# EAGLE board board_schematic_v2 (EAGLE 9.5.2)
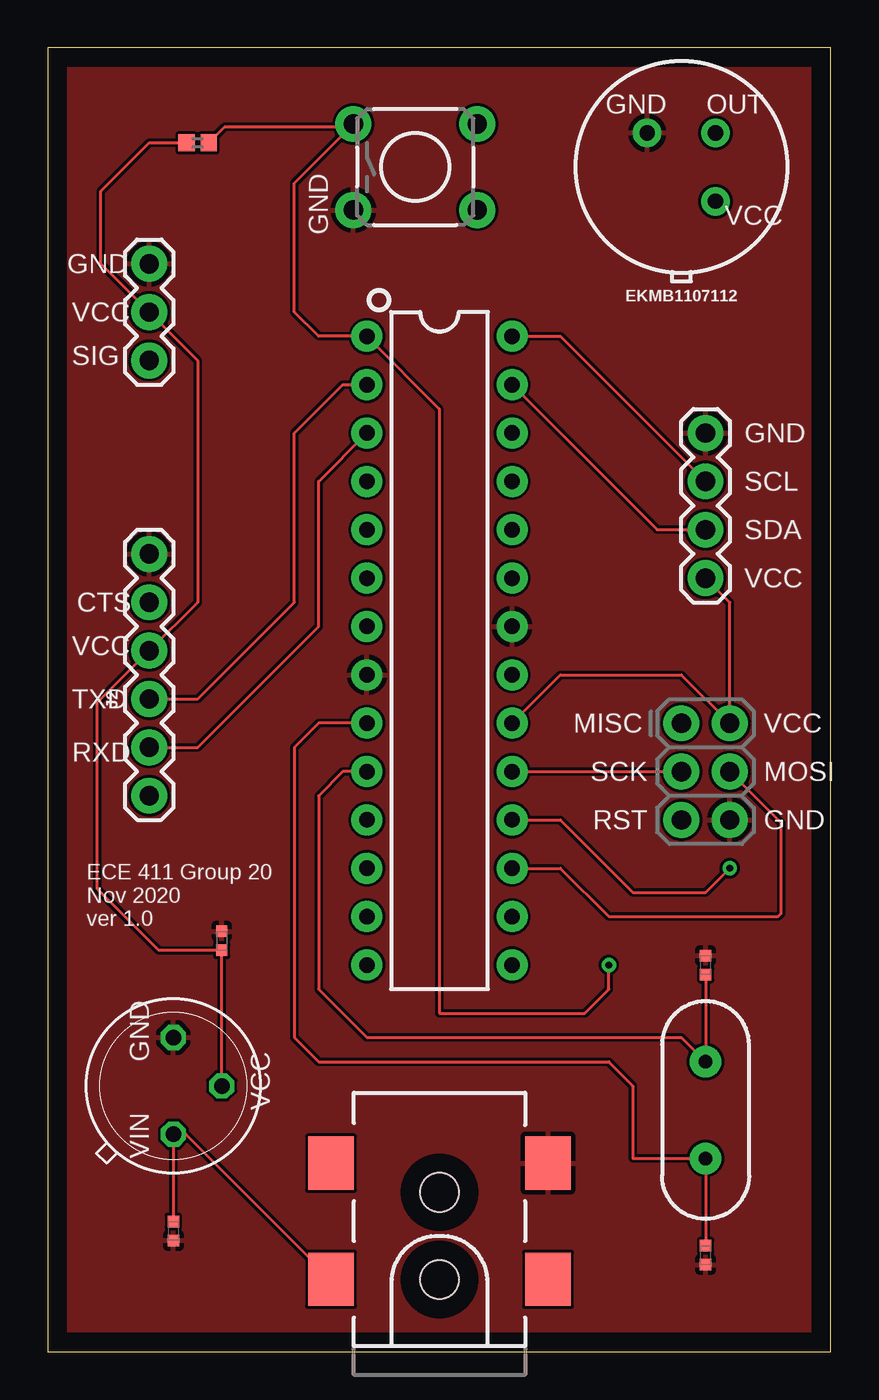
[diagram p0: board, top side]
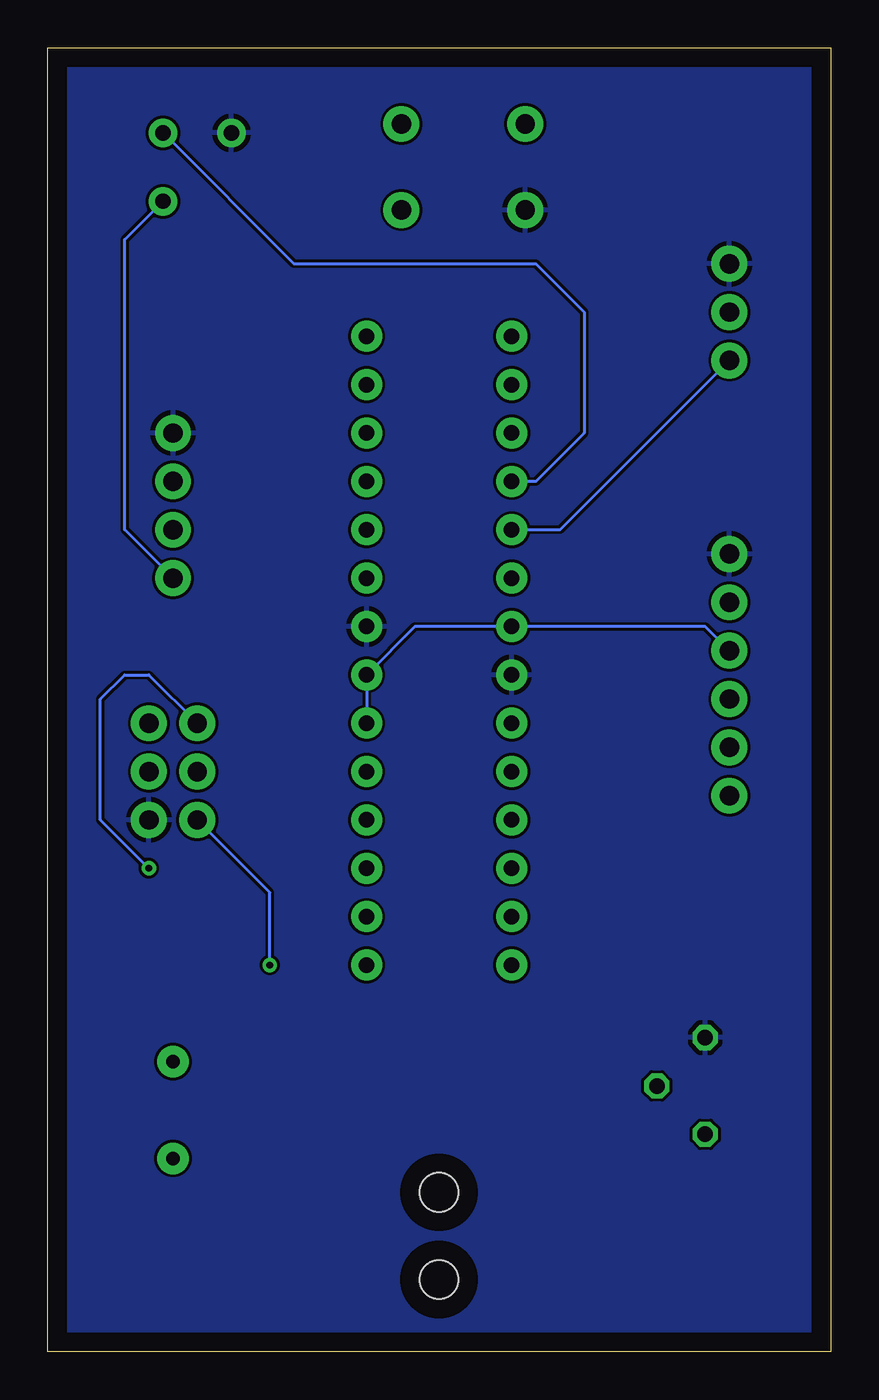
[diagram p1: board, bottom side, seen from below]

Size 41.13 x 68.5 mm. Coordinates in mm from the lower left corner, seen from the top.
Outline: 0,0 41.13,0 41.13,68.5 0,68.5 0,0
Copper layers (1*16): Top 0.035mm / dielectric 1.5mm / Bottom 0.035mm
Design rules "default": minimum track width 6mil, minimum drill 0.35mm, track to track 6mil, track to pad 6mil, pad to pad 6mil, via to via 6mil, smd to smd 6mil, copper to edge 40mil, drill to drill 6mil, minimum pad ring 10mil, minimum via ring 8mil, stop-mask expansion 4mil, vias tented up to drill 0mil, thermal gap 10mil

## Footprints (pad centres in the part's own frame; a part is rotated, then mirrored left to right if it is on the bottom)
0402-TIGHT = smd 0.6 x 0.6: 1 -0.5,0; 2 0.5,0
TO39 = drill 0.813 octagon: 1 0,-2.54; 2 2.54,0; 3 0,2.54
2X3-NS = drill 1.016 pad 1.88: 1 -2.54,-1.27; 2 -2.54,1.27; 3 0,-1.27; 4 0,1.27; 5 2.54,-1.27; 6 2.54,1.27
FTDI_BASIC = drill 1.016 pad 1.88: CTS 10.16,0; DTR 0,0; GND 12.7,0; RXI 2.54,0; TXO 5.08,0; VCC 7.62,0
1X04 = drill 1.016 pad 1.88: 1 0,0; 2 2.54,0; 3 5.08,0; 4 7.62,0
POWER_JACK_SMD = smd 2.8 x 2.4: GND 0,-5.7; P$4 6.1,-5.7; VIN0 0,5.7; VIN1 6.1,5.7 | hole 2.032: 0,0; 4.572,0
1X03 = drill 1.016 pad 1.88: 1 0,0; 2 2.54,0; 3 5.08,0
0402 = smd 0.85 x 0.9: 1 -0.58,0; 2 0.58,0
TACTILE_SWITCH_PTH_6.0MM = drill 1.016 pad 1.88: 1 -3.251,2.261; 2 3.251,2.261; 3 -3.251,-2.261; 4 3.251,-2.261
DIP28 = drill 0.813 pad 1.626: 1 -16.51,-3.81; 2 -13.97,-3.81; 3 -11.43,-3.81; 4 -8.89,-3.81; 5 -6.35,-3.81; 6 -3.81,-3.81; 7 -1.27,-3.81; 8 1.27,-3.81; 9 3.81,-3.81; 10 6.35,-3.81; 11 8.89,-3.81; 12 11.43,-3.81; 13 13.97,-3.81; 14 16.51,-3.81; 15 16.51,3.81; 16 13.97,3.81; 17 11.43,3.81; 18 8.89,3.81; 19 6.35,3.81; 20 3.81,3.81; 21 1.27,3.81; 22 -1.27,3.81; 23 -3.81,3.81; 24 -6.35,3.81; 25 -8.89,3.81; 26 -11.43,3.81; 27 -13.97,3.81; 28 -16.51,3.81
TO-3 = drill 0.8 pad 1.5: GND -1.796,1.796; OUT 1.796,1.796; VDD 1.796,-1.796
HC49US = drill 0.7 pad 1.651: 1 -2.54,0; 2 2.54,0

## Placement (x,y rotation side)
C3  22pF  [0402-TIGHT]  34.54,5.08 270 top
C4  10uF  [0402-TIGHT]  6.6,6.35 270 top
C5  10uF  [0402-TIGHT]  9.14,21.59 90 top
C6  22pF  [0402-TIGHT]  34.54,20.32 90 top
IC1  7805H  [TO39]  6.6,13.97 0 top
J1  AVR_SPI_PROG_3X2NS  [2X3-NS]  34.54,30.48 270 top
J2  6_PIN_SERIAL_CABLEPTH  [FTDI_BASIC]  5.33,29.21 90 top
J3  [1X04]  34.54,40.64 90 top
J4  5.5x2.1mm Barrel  [POWER_JACK_SMD]  20.57,3.81 90 top
M1  SERVO  [1X03]  5.33,52.07 90 top
R1  10k  [0402]  7.87,63.5 0 top
S1  MOMENTARY-SWITCH-SPST-PTH-6.0MM  [TACTILE_SWITCH_PTH_6.0MM]  19.3,62.23 0 top
U1  328P  [DIP28]  20.57,36.83 270 top
U4  EKMB1107112  [TO-3]  33.27,62.23 0 top
Y1  16MHz  [HC49US]  34.54,12.7 270 top

## Library data of the parts
C3 C6 = SparkFun-Capacitors; PROD_ID: CAP-14674
C4 C5 = SparkFun-Capacitors; PROD_ID: CAP-14848
IC1 = adafruit
J1 J2 = SparkFun-Connectors
J3 = SparkFun-Connectors; PROD_ID: CONN-09696
J4 = SparkFun-Connectors; PROD_ID: CONN-08106; SF_ID: PRT-12748
M1 = SparkFun-Electromechanical
R1 = SparkFun-Resistors; PROD_ID: RES-14241
S1 = SparkFun-Switches; PROD_ID: SWCH-08441; SF_SKU: COM-00097
U1 = SparkFun-IC-Microcontroller; PROD_ID: IC-09136
U4 = SparkFun-Sensors; PROD_ID: IC-15370
Y1 = SparkFun-Clocks; PROD_ID: XTAL-08181; SF_ID: COM-00536

## Nets
GND: C3.2 C4.2 C5.2 C6.2 IC1.3 J1.6 J2.GND J3.4 J4.P$4 M1.3 S1.3 U1.8 U1.22 U4.GND
N$1: J1.5 R1.2 S1.1 U1.1
N$2: J2.TXO U1.2
N$3: J2.RXI U1.3
N$4: C3.1 U1.9 Y1.2
N$5: C6.1 U1.10 Y1.1
N$6: C4.1 IC1.1 J4.VIN0
N$7: U1.4 U4.OUT
N$8: M1.1 U1.5
N$9: J3.2 U1.27
N$10: J3.3 U1.28
N$13: J1.3 U1.19
N$15: J1.1 U1.18
N$16: J1.4 U1.17
VCC: C5.1 IC1.2 J1.2 J2.VCC J3.1 M1.2 R1.1 U1.7 U1.20 U1.21 U4.VDD

## Tracks (layer width: path | path; a pad name or v marks a point on that pad's centre or on a via)
GND
  pour Bottom: 0,68.58 0,0 41.15,0 41.15,68.58
  pour Top: 0,68.58 0,0 41.15,0 41.15,68.58
N$1  (via drill 0.35)
  Top 0.152: 15.91,64.35 12.95,61.39 12.95,54.61 14.22,53.34 U1.1 20.57,49.53 20.57,17.78 28.19,17.78 29.46,19.05 v29.46,20.32 | 15.91,64.35 S1.1 | R1.2 9.31,64.35 15.91,64.35
  Bottom 0.152: v29.46,20.32 29.46,24.13 J1.5
N$2
  Top 0.152: J2.TXO 7.87,34.29 12.95,39.37 12.95,48.26 15.49,50.8 U1.2
N$3
  Top 0.152: J2.RXI 7.87,31.75 14.22,38.1 14.22,45.72 U1.3
N$4
  Top 0.152: U1.9 14.22,33.02 12.95,31.75 12.95,16.51 14.22,15.24 29.46,15.24 30.73,13.97 30.73,10.16 Y1.2 C3.1
N$5
  Top 0.152: U1.10 15.49,30.48 14.22,29.21 14.22,19.05 16.76,16.51 33.27,16.51 Y1.1 C6.1
N$6
  Top 0.152: J4.VIN0 7.25,11.43 IC1.1 C4.1
N$7
  Bottom 0.152: U4.OUT 28.19,57.15 15.49,57.15 12.95,54.61 12.95,48.26 15.49,45.72 U1.4
N$8
  Bottom 0.152: U1.5 14.22,43.18 M1.1
N$9
  Top 0.152: U1.27 32,43.18 J3.2
N$10
  Top 0.152: U1.28 26.92,53.34 J3.3
N$13
  Top 0.152: U1.19 J1.3
N$15  (via drill 0.35)
  Top 0.152: U1.18 26.92,27.94 30.73,24.13 34.54,24.13 v35.81,25.4
  Bottom 0.152: v35.81,25.4 38.35,27.94 38.35,34.29 37.08,35.56 35.81,35.56 J1.1
N$16
  Top 0.152: U1.17 26.92,25.4 29.46,22.86 38.35,22.86 38.51,23.02 38.51,27.78 J1.4
VCC
  Top 0.152: IC1.2 C5.1 5.83,21.09 2.62,24.31 2.62,34.11 J2.VCC 7.87,39.37 7.87,52.07 M1.2 2.79,57.15 2.79,60.96 5.33,63.5 R1.1 | J3.1 35.81,39.37 J1.2 33.27,35.56 26.92,35.56 U1.20
  Bottom 0.152: J2.VCC 6.6,38.1 U1.7 21.84,38.1 U1.21 U1.20 | U4.VDD 37.08,58.42 37.08,43.18 J3.1

## Text on the board
tPlace: GND | OUT | VCC | GND | GND | VCC | SIG | GND | SCL | SDA | VCC | CTS | VCC | TXD | MISC | VCC | RXD | SCK | MOSI | RST | GND | ECE 411 Group 20 / Nov 2020 / ver 1.0 | GND | VCC | VIN